# Altium PCB led_2835_driver_circle_34X34cm.PcbDoc (part 2 of 2)
Units mm, origin at the board's own origin, x right, y up, seen from the top; angles counter-clockwise.
Board outline 340 x 340 mm, 2 copper layers (Top Layer, Bottom Layer); 127 components, 122 nets, 254 pads, 0 vias.
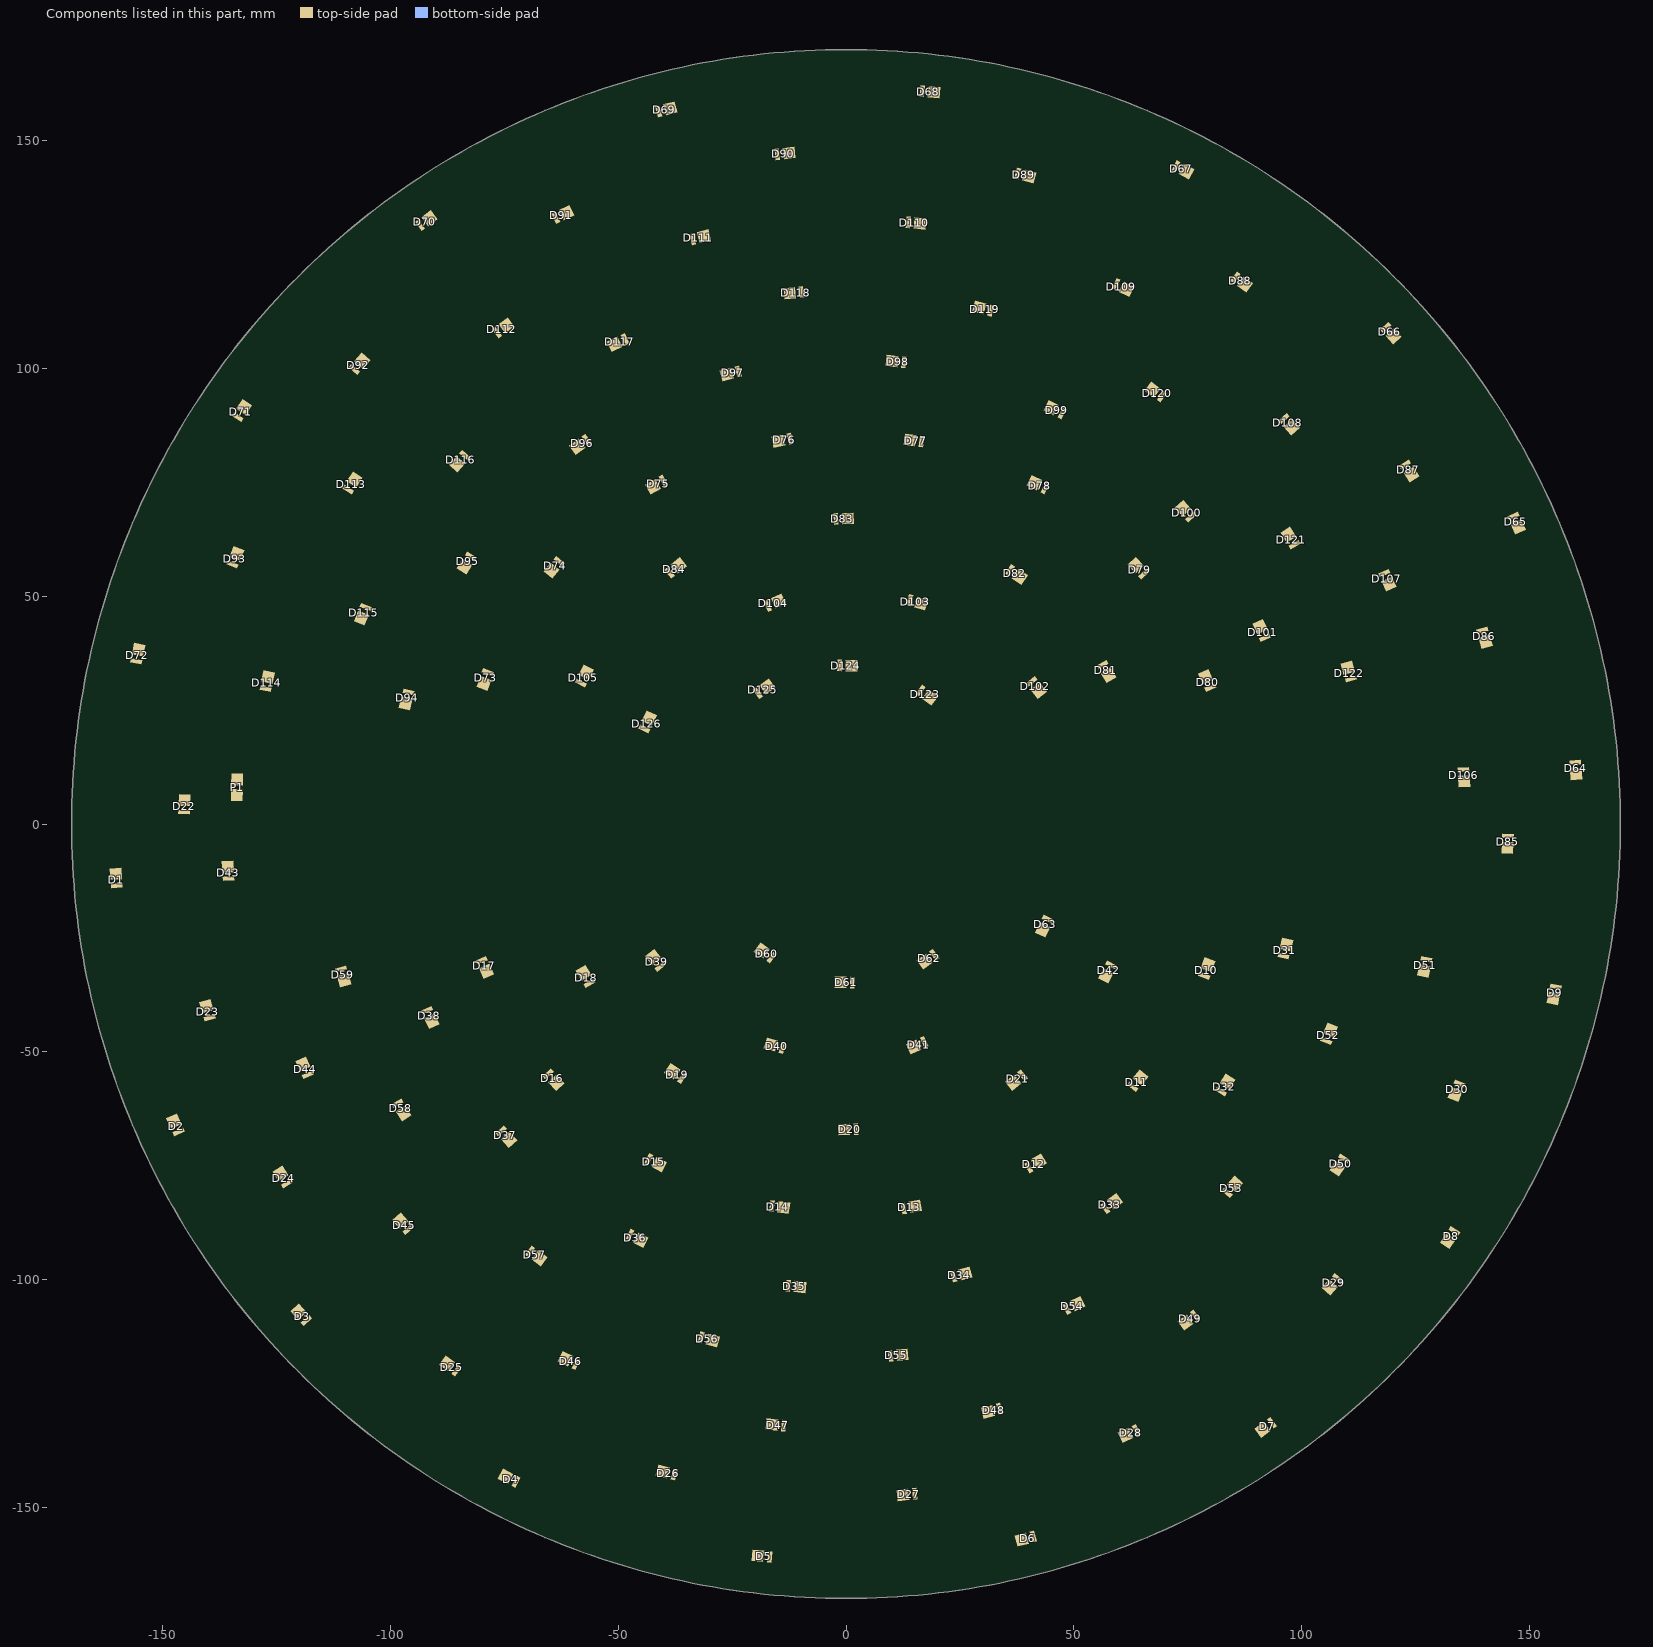
[diagram p2: the components of this part, seen from the top]

## Polygon pours and split planes (outlines as drawn) (continued)
NetD96_C on Top Layer "NONET_L-01_P-001" (solid, remove dead copper, pour order 499): -25.277,100.41 -24.442,97.308 -27.525,91.975 -32.675,101.25
NetD85_C on Top Layer "NONET_L-01_P-001" (solid, remove dead copper, pour order 493): 138.723,40.867 147.48,43.403 150.65,30.65 140.825,24.475
VCC on Top Layer "NONET_L-01_P-001" (solid, remove dead copper, pour order 481): 158.915,12.138 168.115,12.813 168.432,10.179 159.09,9.563
NetD104_C on Top Layer "NONET_L-01_P-001" (solid, remove dead copper, pour order 446): -16.213,46.932 -17.25,49.264 -21.6,50.8 -19.15,42.25
GND on Top Layer "NONET_L-01_P-001" (solid, remove dead copper, pour order 470): -56.79,30.81 -57.075,30.232 -57.075,15.562 -65.55,15.562 -65.55,16.175 -65.321,35.102
GND on Top Layer "NONET_L-01_P-001" (solid, remove dead copper, pour order 468): -57.025,30.575 -65.351,34.652 -65.4,26.496 -59.6,24.2
GND on Top Layer "NONET_L-01_P-001" (solid, remove dead copper, pour order 467): -37.548,54.485 -39.324,56.673 -52.828,56.822 -52.922,47.974 -37.823,48.06
NetD114_C on Top Layer "NONET_L-01_P-001" (solid, remove dead copper, pour order 351): -107.228,46.945 -122.457,27 -104.903,27 -104.439,45.79
NetD93_C on Top Layer "NONET_L-01_P-001" (solid, remove dead copper, pour order 349): -97.885,28.09 -100.4,25.575 -100.4,21.3 -94.975,21.3 -94.975,27.382
NetD64_C on Top Layer "NONET_L-01_P-001" (solid, remove dead copper, pour order 479): 158.845,12.934 161.39,13.112 162.9,16.85 156.425,16.15
NetD104_C on Top Layer "NONET_L-01_P-001" (solid, remove dead copper, pour order 466): -56.021,31.371 -59.056,32.827 -56.5,41.3 -49.925,33.35
NetD95_C on Top Layer "NONET_L-01_P-001" (solid, remove dead copper, pour order 457): -81.516,57.6 -83.65,58.991 -83.65,64.95 -77.15,57.875
NetD73_C on Top Layer "NONET_L-01_P-001" (solid, remove dead copper, pour order 455): -62.469,55.552 -62.675,48.425 -71.725,55.45 -65.119,57.729
NetD73_C on Top Layer "NONET_L-01_P-001" (solid, remove dead copper, pour order 452): -77.576,32.417 -73.175,33.7 -81.225,38 -79.975,33.289
NetD94_C on Top Layer "NONET_L-01_P-001" (solid, remove dead copper, pour order 451): -81.623,56.707 -80.9,50.475 -90.925,55.125 -84.379,58.502
NetD94_C on Top Layer "NONET_L-01_P-001" (solid, remove dead copper, pour order 450): -94.92,28.193 -97.393,28.81 -99.775,33.975 -90.425,30.725
NetD83_C on Top Layer "NONET_L-01_P-001" (solid, remove dead copper, pour order 449): -36.568,54.544 -38.69,57.188 -34.975,63.225 -30.575,53.35
NetD83_C on Top Layer "NONET_L-01_P-001" (solid, remove dead copper, pour order 448): -1.629,65.699 -1.725,68.261 -5.838,70.333 -4.7,61.15
NetD82_C on Top Layer "NONET_L-01_P-001" (solid, remove dead copper, pour order 447): -0.813,65.23 -0.91,68.479 5.425,71.3 4.075,60.5
NetD82_C on Top Layer "NONET_L-01_P-001" (solid, remove dead copper, pour order 444): 35.675,54.393 31.075,53.275 35,61.425 37.089,56.497
NetD103_C on Top Layer "NONET_L-01_P-001" (solid, remove dead copper, pour order 443): -15.188,46.608 -16.582,49.737 -11.975,53.975 -10.275,43.6
NetD103_C on Top Layer "NONET_L-01_P-001" (solid, remove dead copper, pour order 442): 14.112,47.762 11.15,44.8 11.825,53.5 14.798,50.213
NetD97_C on Top Layer "NONET_L-01_P-001" (solid, remove dead copper, pour order 441): 11.208,99.709 11.56,103.008 6.225,105.55 6.75,95.85
NetD98_C on Top Layer "NONET_L-01_P-001" (solid, remove dead copper, pour order 440): 12.063,100.141 12.329,102.683 17.425,104.425 14.325,95.4
NetD98_C on Top Layer "NONET_L-01_P-001" (solid, remove dead copper, pour order 439): 45.417,89.129 46.976,92.204 43.325,96.55 40.15,87
NetD102_C on Top Layer "NONET_L-01_P-001" (solid, remove dead copper, pour order 438): 14.72,46.999 15.658,50.266 21.65,50.725 17.3,41.35
NetD99_C on Top Layer "NONET_L-01_P-001" (solid, remove dead copper, pour order 437): 46.383,89.272 47.542,91.55 54.175,91.55 47.15,83.825
NetD78_C on Top Layer "NONET_L-01_P-001" (solid, remove dead copper, pour order 436): 42.564,72.662 43.805,75.053 48.475,75.55 43.175,67.675
NetD81_C on Top Layer "NONET_L-01_P-001" (solid, remove dead copper, pour order 435): 36.091,53.586 37.96,56.342 45.4,55.575 37.7,47.4
NetD78_C on Top Layer "NONET_L-01_P-001" (solid, remove dead copper, pour order 434): 63.247,54.689 58.4,55.375 64.775,62.075 65.695,56.979
NetD79_C on Top Layer "NONET_L-01_P-001" (solid, remove dead copper, pour order 433): 64.114,54.397 65.977,56.134 71.75,54.8 63.225,49.3
NetD99_C on Top Layer "NONET_L-01_P-001" (solid, remove dead copper, pour order 432): 73.495,67.131 75.974,69.356 74.225,75.525 67.5,67.625
NetD100_C on Top Layer "NONET_L-01_P-001" (solid, remove dead copper, pour order 431): 74.42,66.879 76.307,68.581 82.05,67.175 73.425,62.225
NetD100_C on Top Layer "NONET_L-01_P-001" (solid, remove dead copper, pour order 430): 89.919,41.425 92.909,42.747 93.575,48.875 84.65,44.025
NetD81_C on Top Layer "NONET_L-01_P-001" (solid, remove dead copper, pour order 427): 55.472,33.855 50.275,34.725 58.047,39.865 57.673,35.126
NetD79_C on Top Layer "NONET_L-01_P-001" (solid, remove dead copper, pour order 426): 81.013,31.814 82.05,38.725 71.275,34.05 77.932,30.48
NetD102_C on Top Layer "NONET_L-01_P-001" (solid, remove dead copper, pour order 425): 40.049,30.147 35.275,29.825 40.95,36.175 42.086,31.681
NetD122_C on Top Layer "NONET_L-01_P-001" (solid, remove dead copper, pour order 424): 109.499,31.955 112.029,32.679 112.945,29.075 108.972,29.075
NetD121_C on Top Layer "NONET_L-01_P-001" (solid, remove dead copper, pour order 423): 108.858,32.616 112.077,33.523 114.125,39.325 103.825,37.075
NetD120_C on Top Layer "NONET_L-01_P-001" (solid, remove dead copper, pour order 422): 99.116,63.253 96.372,61.51 90.3,63.625 99.275,69.375
NetD120_C on Top Layer "NONET_L-01_P-001" (solid, remove dead copper, pour order 421): 68.201,93.078 69.692,95.123 74.125,95.15 68.3,87.975
NetD119_C on Top Layer "NONET_L-01_P-001" (solid, remove dead copper, pour order 420): 67.281,93.176 69.219,95.857 66.375,101.775 60.975,92.5
NetD119_C on Top Layer "NONET_L-01_P-001" (solid, remove dead copper, pour order 419): 30.945,111.59 31.602,114.047 36.8,115.625 32.7,106.725
NetD118_C on Top Layer "NONET_L-01_P-001" (solid, remove dead copper, pour order 418): 30.032,111.313 30.895,114.503 26.325,118.45 25.575,108.8
NetD118_C on Top Layer "NONET_L-01_P-001" (solid, remove dead copper, pour order 417): -10.121,115.442 -10.385,117.975 -6.6,120.7 -7.15,111.8
NetD117_C on Top Layer "NONET_L-01_P-001" (solid, remove dead copper, pour order 416): -10.856,114.811 -14.3,110.1 -16.8,120.45 -11.217,118.162
NetD117_C on Top Layer "NONET_L-01_P-001" (solid, remove dead copper, pour order 415): -48.367,105.061 -44.775,102.8 -47.475,110.65 -49.486,107.336
NetD116_C on Top Layer "NONET_L-01_P-001" (solid, remove dead copper, pour order 414): -48.911,104.299 -50.382,107.305 -57.75,107.375 -51.15,98.6
NetD116_C on Top Layer "NONET_L-01_P-001" (solid, remove dead copper, pour order 413): -83.047,79.722 -84.936,81.422 -84.525,86.35 -78.5,79.375
NetD115_C on Top Layer "NONET_L-01_P-001" (solid, remove dead copper, pour order 412): -83.297,78.865 -83.775,72.1 -91.725,79.225 -85.757,81.07
NetD112_C on Top Layer "NONET_L-01_P-001" (solid, remove dead copper, pour order 411): -107.171,73.641 -100.225,76.025 -109.625,81.825 -109.947,75.437
NetD115_C on Top Layer "NONET_L-01_P-001" (solid, remove dead copper, pour order 410): -104.411,46.687 -99.475,48.9 -108.425,52.7 -106.786,47.652
NetD124_C on Top Layer "NONET_L-01_P-001" (solid, remove dead copper, pour order 409): -17.265,27.951 -11.5,26.25 -15.45,36.4 -19.183,30.696
NetD124_C on Top Layer "NONET_L-01_P-001" (solid, remove dead copper, pour order 408): -0.932,33.521 -3.4,29.425 -5.425,38.525 -0.877,36.058
NetD123_C on Top Layer "NONET_L-01_P-001" (solid, remove dead copper, pour order 407): -0.141,32.985 3.25,29.375 6.75,39.275 -0.076,36.27
NetD123_C on Top Layer "NONET_L-01_P-001" (solid, remove dead copper, pour order 406): 16.03,27.967 17.523,30.022 15.975,34.55 11.625,26.5
NetD114_C on Top Layer "NONET_L-01_P-001" (solid, remove dead copper, pour order 405): -128.6,30.449 -129.225,27 -124.75,27 -124.506,29.589
NetD72_C on Top Layer "NONET_L-01_P-001" (solid, remove dead copper, pour order 404): -77.55,22.15 -77.451,15.525 -86.904,15.525
NetD92_C on Top Layer "NONET_L-01_P-001" (solid, remove dead copper, pour order 403): -106.667,99.279 -108.558,100.982 -114.575,99.1 -106.875,93.575
NetD92_C on Top Layer "NONET_L-01_P-001" (solid, remove dead copper, pour order 402): -132.732,57.609 -135.603,58.765 -136.075,66 -127.175,61.225
NetD113_C on Top Layer "NONET_L-01_P-001" (solid, remove dead copper, pour order 401): -107.942,73.184 -110.078,74.571 -116.125,72.625 -107.253,67.292
NetD113_C on Top Layer "NONET_L-01_P-001" (solid, remove dead copper, pour order 400): -125.608,30.656 -128.786,31.323 -131.575,37.175 -120.6,35.525
NetD91_C on Top Layer "NONET_L-01_P-001" (solid, remove dead copper, pour order 399): -105.727,99.512 -108.253,101.791 -105.65,109.6 -98.325,100.5
NetD91_C on Top Layer "NONET_L-01_P-001" (solid, remove dead copper, pour order 398): -62.686,132.153 -64.475,125.925 -70.975,134.675 -63.804,134.445
NetD112_C on Top Layer "NONET_L-01_P-001" (solid, remove dead copper, pour order 397): -75.479,107.152 -76.971,109.209 -83.15,109.15 -76.075,101.55
NetD111_C on Top Layer "NONET_L-01_P-001" (solid, remove dead copper, pour order 396): -74.576,107.284 -76.48,109.886 -73.05,116.7 -67.9,106.6
NetD90_C on Top Layer "NONET_L-01_P-001" (solid, remove dead copper, pour order 395): -61.758,132.066 -55.425,129.85 -59.25,139.675 -63.177,134.991
NetD90_C on Top Layer "NONET_L-01_P-001" (solid, remove dead copper, pour order 394): -14.436,145.801 -14.704,148.336 -20.375,150.725 -17.4,141.075
NetD89_C on Top Layer "NONET_L-01_P-001" (solid, remove dead copper, pour order 393): -13.588,145.362 -13.93,148.627 -8.575,151.625 -8.925,141.475
NetD89_C on Top Layer "NONET_L-01_P-001" (solid, remove dead copper, pour order 392): 37.875,141.454 38.529,143.913 35.35,146.975 33.725,138.125
NetD88_C on Top Layer "NONET_L-01_P-001" (solid, remove dead copper, pour order 391): 38.459,140.594 39.359,143.907 44.875,144.65 40.7,135.525
NetD88_C on Top Layer "NONET_L-01_P-001" (solid, remove dead copper, pour order 390): 84.798,118.219 86.625,120.731 83.675,126.75 79,116.85
NetD111_C on Top Layer "NONET_L-01_P-001" (solid, remove dead copper, pour order 389): -32.87,127.259 -33.528,129.722 -38.275,130.975 -35.675,121.95
NetD110_C on Top Layer "NONET_L-01_P-001" (solid, remove dead copper, pour order 388): -31.982,127.046 -32.818,130.161 -27.375,134.85 -26.175,124.05
NetD110_C on Top Layer "NONET_L-01_P-001" (solid, remove dead copper, pour order 387): 14.004,130.6 14.285,133.298 9.275,137.55 9.275,126.2
NetD109_C on Top Layer "NONET_L-01_P-001" (solid, remove dead copper, pour order 386): 14.766,130.199 15.11,133.458 21.625,135.875 19.225,125.175
NetD108_C on Top Layer "NONET_L-01_P-001" (solid, remove dead copper, pour order 385): 59.604,116.349 61.45,110.225 67.85,118.525 61.095,119.268
NetD109_C on Top Layer "NONET_L-01_P-001" (solid, remove dead copper, pour order 384): 59.142,117.18 60.293,119.432 57.675,124.375 53.525,114.975
NetD108_C on Top Layer "NONET_L-01_P-001" (solid, remove dead copper, pour order 383): 95.493,87.77 97.385,89.473 97.125,94.075 90.75,88.075
NetD106_C on Top Layer "NONET_L-01_P-001" (solid, remove dead copper, pour order 382): 120.192,54.558 117.251,53.257 116.275,45.875 127.15,50.925
NetD107_C on Top Layer "NONET_L-01_P-001" (solid, remove dead copper, pour order 381): 95.703,86.879 98.111,89.047 104.4,86.55 95.45,80.375
NetD107_C on Top Layer "NONET_L-01_P-001" (solid, remove dead copper, pour order 380): 119.511,55.134 117.158,54.087 112.4,55.625 120.575,60.1
NetD87_C on Top Layer "NONET_L-01_P-001" (solid, remove dead copper, pour order 379): 85.523,117.825 87.421,120.451 95.525,118.525 86.975,109.825
NetD87_C on Top Layer "NONET_L-01_P-001" (solid, remove dead copper, pour order 378): 124.058,79.157 124.75,85.075 115.65,79.475 121.894,77.804
NetD86_C on Top Layer "NONET_L-01_P-001" (solid, remove dead copper, pour order 377): 121.969,76.895 121.075,71.175 130.525,75.9 124.807,78.656
NetD86_C on Top Layer "NONET_L-01_P-001" (solid, remove dead copper, pour order 376): 141.051,42.368 142.65,47.025 133.875,43.825 138.593,41.668
NetD71_C on Top Layer "NONET_L-01_P-001" (solid, remove dead copper, pour order 372): -154.105,36.706 -150.975,41.4 -158.325,42.45 -156.998,37.313
NetD68_C on Top Layer "NONET_L-01_P-001" (solid, remove dead copper, pour order 370): -39.435,155.187 -34.175,152.975 -35.55,160.425 -40.228,158.199
NetD68_C on Top Layer "NONET_L-01_P-001" (solid, remove dead copper, pour order 369): 17.121,159.592 12.55,156.275 12.575,163.6 17.386,162.125
NetD67_C on Top Layer "NONET_L-01_P-001" (solid, remove dead copper, pour order 368): 17.877,159.245 22.725,154.925 23.875,162.45 18.197,162.127
NetD67_C on Top Layer "NONET_L-01_P-001" (solid, remove dead copper, pour order 367): 72.282,143.026 67.875,141.95 70.375,147.95 73.44,145.299
NetD66_C on Top Layer "NONET_L-01_P-001" (solid, remove dead copper, pour order 366): 72.876,142.443 76.325,136.925 80.4,143.35 74.215,145.057
NetD66_C on Top Layer "NONET_L-01_P-001" (solid, remove dead copper, pour order 365): 117.843,107.768 113,109.15 117.825,114.075 119.736,109.471
NetD69_C on Top Layer "NONET_L-01_P-001" (solid, remove dead copper, pour order 362): -40.292,155.309 -42.5,151.45 -45.95,157.875 -40.953,157.774
NetD70_C on Top Layer "NONET_L-01_P-001" (solid, remove dead copper, pour order 361): -92.372,130.693 -93.425,125.975 -97.775,131.45 -93.868,132.757
NetD70_C on Top Layer "NONET_L-01_P-001" (solid, remove dead copper, pour order 360): -131.557,89.633 -126.775,92.375 -132.325,96.7 -134.02,91.226
NetD125_C on Top Layer "NONET_L-01_P-001" (solid, remove dead copper, pour order 359): -42.604,21.546 -39.225,24.925 -42.75,26.725
NetD125_C on Top Layer "NONET_L-01_P-001" (solid, remove dead copper, pour order 358): -42.581,21.523 -37.575,31.775 -45.1,31.75 -45.124,22.698
NetD125_C on Top Layer "NONET_L-01_P-001" (solid, remove dead copper, pour order 357): -18.25,27.975 -23.65,24.175 -23.65,31.3 -19.71,30.062
NetD65_C on Top Layer "NONET_L-01_P-001" (solid, remove dead copper, pour order 355): 120.434,109.009 125.675,105.975 119.5,101.45 118.147,106.961
NetD65_C on Top Layer "NONET_L-01_P-001" (solid, remove dead copper, pour order 354): 147.867,67.652 147.575,71.95 141.2,68.5 145.537,66.617
NetD72_C on Top Layer "NONET_L-01_P-001" (solid, remove dead copper, pour order 352): -80.475,32.614 -82.599,26.825 -77.525,26.825 -77.659,31.598
NetD114_C on Top Layer "NONET_L-01_P-001" (solid, remove dead copper, pour order 350): -119.475,27 -129.225,27 -125.651,29.545 -119.475,29.825
NetD93_C on Top Layer "NONET_L-01_P-001" (solid, remove dead copper, pour order 348): -136.475,58.225 -138.85,55.85 -135.375,52.375 -132.978,56.839
NetD72_C on Top Layer "NONET_L-01_P-001" (solid, remove dead copper, pour order 347): -156.939,36.482 -157.875,33.825 -159,30.675 -154.079,30.675 -154.445,35.953
VCC on Top Layer "NONET_L-01_P-001" (solid, remove dead copper, pour order 339): 164.7,16.302 165.3,10.502 168.392,10.69 167.667,16.585
NetD22_C on Top Layer "NONET_L-01_P-001" (solid, remove dead copper, pour order 328): -146.585,3.145 -149.375,0 -141.6,-0.9 -144.01,3.057

## Keep-outs
Keep-Out Layer:
  circle w0.2: c137.265,-79.25 r1.5
  circle w0.2: c-137.265,-79.25 r1.5
  circle w0.2: c-137.265,-79.25 r1.5
  circle w0.2: c-137.265,-79.25 r1.5
  circle w0.2: c137.265,-79.25 r1.5
  circle w0.2: c137.265,-79.25 r1.5
  circle w0.2: c0,-158.5 r1.5
  circle w0.2: c0,-158.5 r1.5
  circle w0.2: c137.265,79.25 r1.5
  circle w0.2: c-137.265,79.25 r1.5
  circle w0.2: c0,158.5 r1.5
  circle w0.2: c0,0 r170

## Other copper
Top Layer:
  region net VCC: -137.075,7.7 -161.7,7.7 -161.7,3.975 -137.475,3.975 -137.075,3.575
  region net VCC: -137.075,2.9 -137.075,7.7 -132.4,7.7 -132.4,2.9
Multi-Layer:
  pour cut-out: 139.43,-80.5 cw(c137.265,-79.25) 136.015,-81.415 cw(c137.265,-79.25) 135.1,-78 cw(c137.265,-79.25) 138.515,-77.085 cw(c137.265,-79.25)
  pour cut-out: -139.43,-80.5 cw(c-137.265,-79.25) -138.515,-77.085 cw(c-137.265,-79.25) -135.1,-78 cw(c-137.265,-79.25) -136.015,-81.415 cw(c-137.265,-79.25)
  pour cut-out: 0,-161 cw(c0,-158.5) -2.5,-158.5 cw(c0,-158.5) 0,-156 cw(c0,-158.5) 2.5,-158.5 cw(c0,-158.5)
  pour cut-out: 137.265,76.75 cw(c137.265,79.25) 134.765,79.25 cw(c137.265,79.25) 137.265,81.75 cw(c137.265,79.25) 139.765,79.25 cw(c137.265,79.25)
  pour cut-out: -135.082,78.02 cw(c-137.247,79.27) -138.497,77.104 cw(c-137.247,79.27) -139.412,80.52 cw(c-137.247,79.27) -135.997,81.435 cw(c-137.247,79.27)
  pour cut-out: 0.026,155.994 cw(c0.026,158.494) -2.474,158.494 cw(c0.026,158.494) 0.026,160.994 cw(c0.026,158.494) 2.526,158.494 cw(c0.026,158.494)

## Silkscreen, mask and mechanical layers (free items; w line width, h text height)
Top Overlay:
  circle w0.1: c137.265,-79.25 r2.5
  circle w0.1: c-137.265,-79.25 r2.5
  circle w0.1: c0,-158.5 r2.5
  circle w0.1: c137.265,79.25 r2.5
  circle w0.1: c-137.265,79.25 r2.5
  circle w0.1: c0,158.5 r2.5
  lines w0.1: -125,-15 125,-15 125,15 -125,15 -125,-15
  text "www.tissaphern.com" at -36.709,19.161 h8
  text "www.tissaphern.com" at 36.709,-19.161 h8 r180